# EAGLE board breakout_mdbt40 (EAGLE 7.4.0)
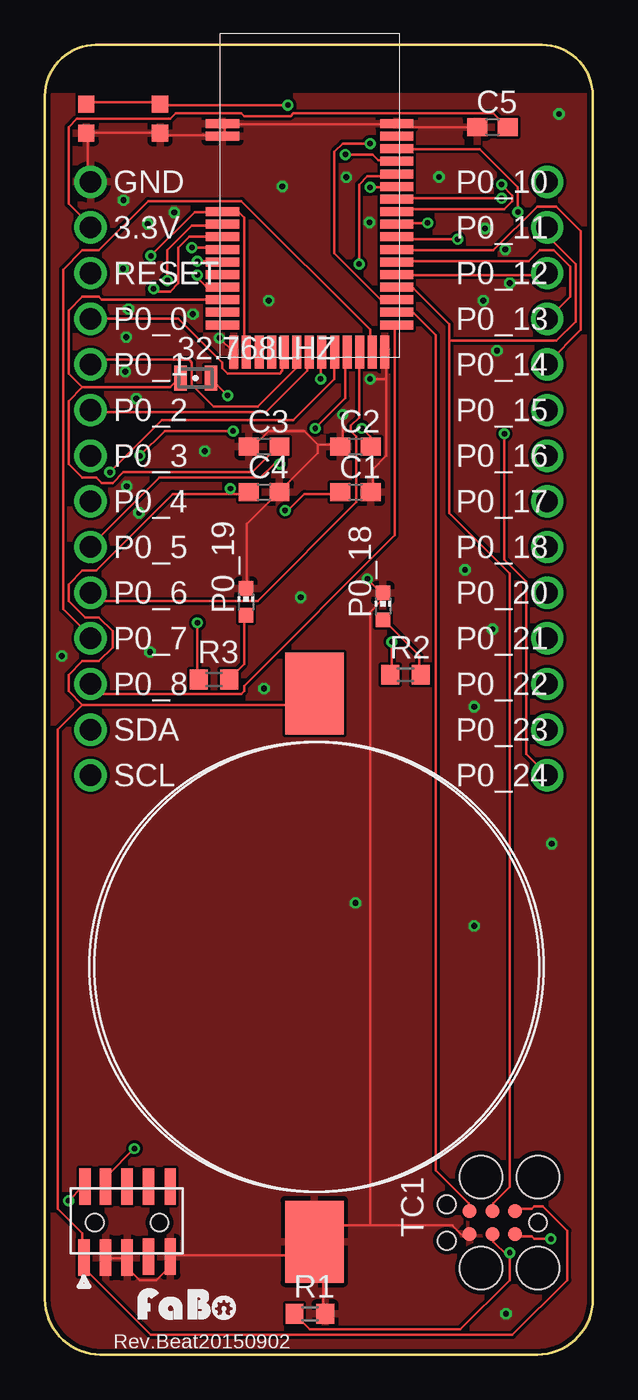
[diagram p0: board, top side]
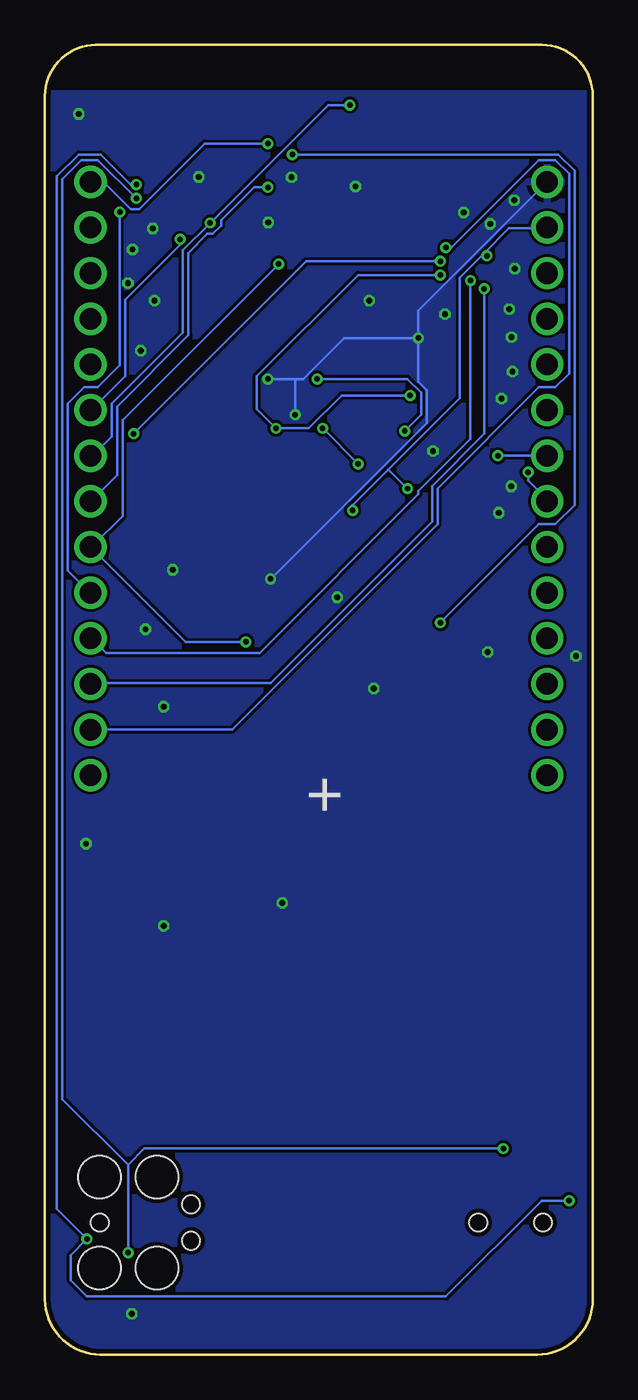
[diagram p1: board, bottom side, seen from below]

Size 30.48 x 72.88 mm. Coordinates in mm from the lower left corner, seen from the top.
Copper layers (1*16): Top 0.035mm / dielectric 1.5mm / Bottom 0.035mm
Design rules "SeeedStudio_2layer_DRU_no_angle_20140221": minimum track width 6mil, minimum drill 12mil, track to track 6mil, track to pad 6mil, pad to pad 6mil, via to via 6mil, smd to smd 0mil, copper to edge 10mil, drill to drill 10mil, minimum pad ring 10mil, minimum via ring 6mil, stop-mask expansion 2mil, vias tented up to drill 100mil, thermal gap 10mil
tRestrict: area -1.9,70.2 to 33.6,74.9
bRestrict: area -1.8,70.4 to 33.8,74.9

## Footprints (pad centres in the part's own frame; a part is rotated, then mirrored left to right if it is on the bottom)
FC-12M = smd 0.7 x 1.4: 1 -0.85,0; 2 0.85,0
C0603 = smd 1.1 x 1: 1 -0.85,0; 2 0.85,0
CHIP-LED0603 = smd 0.8 x 0.8: A 0,-0.75; C 0,0.75
R0603 = smd 1 x 1.1: 1 -0.85,0; 2 0.85,0
TC2030-IDC = smd 0.787 x 0.787: 1 -1.27,-0.635; 2 -1.27,0.635; 3 0,-0.635; 4 0,0.635; 5 1.27,-0.635; 6 1.27,0.635 | hole 0.991: -2.54,0; 2.54,1.016; 2.54,-1.016 | hole 2.375: -2.54,2.54; -2.54,-2.54; 0.635,2.54; 0.635,-2.54
RAYTAC-MDBT40 = smd 1.85 x 0.5: 1 -4.86,4; 2 -4.86,3.3; 3 -4.86,-0.9; 4 -4.86,-1.6; 5 -4.86,-2.3; 6 -4.86,-3; 7 -4.86,-3.7; 8 -4.86,-4.4; 9 -4.86,-5.1; 10 -4.86,-5.8; 11 -4.86,-6.5; 12 -4.86,-7.2; 26 4.84,-7.2; 27 4.84,-6.5; 28 4.84,-5.8; 29 4.84,-5.1; 30 4.84,-4.4; 31 4.84,-3.7; 32 4.84,-3; 33 4.84,-2.3; 34 4.84,-1.6; 35 4.84,-0.9; 36 4.84,-0.2; 37 4.84,0.5; 38 4.84,1.2; 39 4.84,1.9; 40 4.84,2.6; 41 4.84,3.3; 42 4.84,4 | smd 0.5 x 1.85: 13 -4.22,-8.71; 14 -3.52,-8.71; 15 -2.82,-8.71; 16 -2.12,-8.71; 17 -1.42,-8.71; 18 -0.72,-8.71; 19 -0.02,-8.71; 20 0.68,-8.71; 21 1.38,-8.71; 22 2.08,-8.71; 23 2.78,-8.71; 24 3.48,-8.71; 25 4.18,-8.71
SMTU2450 = smd 3.251 x 4.572: P$_GND 0,-15.29; P$_VCC 0,15.21
BREAKOUT_BLE_NORDIC = drill 1.2: 3.3V -12.7,24.13; GND -12.7,26.67; P0_0 -12.7,19.05; P0_1 -12.7,16.51; P0_2 -12.7,13.97; P0_3 -12.7,11.43; P0_4 -12.7,8.89; P0_5 -12.7,6.35; P0_6 -12.7,3.81; P0_7 -12.7,1.27; P0_8 -12.7,-1.27; P1_0 12.7,26.67; P1_1 12.7,24.13; P1_2 12.7,21.59; P1_3 12.7,19.05; P1_4 12.7,16.51; P1_5 12.7,13.97; P1_6 12.7,11.43; P1_7 12.7,8.89; P1_8 12.7,6.35; P2_0 12.7,3.81; P2_1 12.7,1.27; P2_2 12.7,-1.27; P2_3 12.7,-3.81; P2_4 12.7,-6.35; RESET -12.7,21.59; SCL -12.7,-6.35; SDA -12.7,-3.81
PIN-HEADER-SMT(1.27MM)2X5 = smd 0.635 x 2.032: 1 -2.4,-1.95; 2 -2.35,2; 3 -1.2,-1.95; 4 -1.2,2; 5 0,-1.95; 6 0,2; 7 1.2,-1.9; 8 1.2,2; 9 2.4,-1.9; 10 2.4,2 | hole 1: 1.8,0; -1.8,0
SWITCH-4P(KMR2) = smd 0.9 x 0.95: 1 -1,0; 2 3.1,0; 3 -1,-1.6; 4 3.1,-1.6

## Placement (x,y rotation side)
32.768LHZ  FC-12M  [FC-12M]  8.38,54.34 0 top
C1  0.1uf  [C0603]  17.27,47.99 0 top
C2  12pf  [C0603]  17.27,50.53 0 top
C3  12pf  [C0603]  12.19,50.53 0 top
C4  0.1uf  [C0603]  12.19,47.99 0 top
C5  0.1uf  [C0603]  24.89,68.31 0 top
P0_18  [CHIP-LED0603]  18.8,41.64 0 top
P0_19  [CHIP-LED0603]  11.18,41.89 0 top
R1  10K  [R0603]  14.73,2.27 0 top
R2  [R0603]  20.07,37.83 0 top
R3  [R0603]  9.4,37.57 0 top
TC1  TC2030-IDC  [TC2030-IDC]  24.89,7.35 180 top
U$1  RAYTAC-MDBT40  [RAYTAC-MDBT40]  14.73,64.5 0 top
U$2  SMTU2450-TOP  [SMTU2450]  14.99,21.57 0 top
U$3  BREAKOUT_BLE_NORDIC  [BREAKOUT_BLE_NORDIC]  15.24,38.59 0 top
U$4  PIN-HEADER-SMT(1.27MM)2X5  [PIN-HEADER-SMT(1.27MM)2X5]  4.57,7.35 0 top
U$5  SWICTH-4P(KMR2)  [SWITCH-4P(KMR2)]  3.3,69.58 0 top
U$7  [LOGO_FABO_S]  7.95,1.94 0 top

## Library data of the parts
32.768LHZ = crystal
C1-C5 R1-R3 = adafruit
P0_18 P0_19 = led
TC1 = TagConnect
U$1 = gclueBT
U$2 = GClue-Supply
U$3 U$4 = gclue
U$5 = gclue-test
U$7 = FaBo

## Nets
+3V3: C1.1 C4.1 C5.2 TC1.1 U$1.3 U$1.14 U$2.P$_VCC U$3.3.3V U$4.1
GND: C1.2 C2.1 C3.1 C4.2 C5.1 P0_18.C P0_19.C R1.2 TC1.6 U$1.1 U$1.2 U$1.13 U$1.25 U$1.42 U$2.P$_GND U$3.GND U$4.3 U$4.5 U$4.9 U$5.3 U$5.4
N$1: P0_18.A R2.2
N$2: P0_19.A R3.2
N$7: 32.768LHZ.2 C2.2 U$1.9
N$8: 32.768LHZ.1 C3.2 U$1.10
P0_00: U$1.17 U$3.P0_0
P0_01: U$1.18 U$3.P0_1
P0_02: U$1.19 U$3.P0_2
P0_03: U$1.20 U$3.P0_3
P0_04: U$1.21 U$3.P0_4
P0_05: U$1.22 U$3.P0_5
P0_06: U$1.23 U$3.P0_6
P0_07: U$1.24 U$3.P0_7
P0_08: U$1.26 U$3.P0_8
P0_09: TC1.5 U$1.27
P0_10: U$1.28 U$3.P1_0
P0_11: TC1.3 U$1.29 U$3.P1_1
P0_12: U$1.30 U$3.P1_2
P0_13: U$1.31 U$3.P1_3
P0_14: U$1.32 U$3.P1_4
P0_15: U$1.33 U$3.P1_5
P0_16: U$1.34 U$3.P1_6 U$5.1 U$5.2
P0_17: U$1.37 U$3.P1_7
P0_18: R2.1 U$1.38 U$3.P1_8
P0_19: R3.1 U$1.39
P0_20: U$1.40 U$3.P2_0
P0_21: U$1.4 U$3.P2_1
P0_22: U$1.5 U$3.P2_2
P0_23: U$1.6 U$3.P2_3
P0_24: U$1.7 U$3.P2_4
P0_25: U$1.8
P0_28: U$1.11
P0_29: U$1.12
P0_30: U$1.16
RESET: U$3.RESET
RESET1: U$4.10
SWCLK: R1.1 TC1.4 U$1.36 U$4.4
SWDIO: TC1.2 U$1.35 U$4.2

## Tracks (layer width: path | path; a pad name or v marks a point on that pad's centre or on a via)
+3V3  (via drill 0.3)
  Top 0.152: TC1.1 26.16,8.11 27.08,8.11 27.23,8.26 27.69,8.26 29.06,6.89 29.06,4.15 26.01,1.1 5.89,1.1 2.24,4.76 2.24,5.37 U$4.1 2.08,5.52 2.08,6.74 0.71,8.11 0.71,34.78 2.08,36.15 | 10.31,47.89 7.11,47.89 2.85,43.62 2.08,43.62 1.32,42.86 1.32,41.94 2.24,41.03 3,41.03 3.76,40.27 3.76,39.35 3,38.59 2.08,38.59 1.32,37.83 1.32,36.91 2.08,36.15 | 10.31,47.89 11.23,47.89 C4.1 | 2.08,36.15 14.28,36.15 14.88,36.76 U$2.P$_VCC | U$1.14 11.07,55.81 11.07,63.28 10.77,63.58 10.01,63.58 U$1.3 9.86,63.58 8.33,63.58 v5.89,61.15 | v13.36,46.97 13.51,46.97 14.43,47.89 16.41,47.89 C1.1 | C5.2 25.71,68.31 24.94,69.07 13.82,69.07 13.67,68.92 11.07,68.92 10.92,69.07 7.26,69.07 6.96,68.77 1.78,68.77 1.32,68.31 1.32,64.04 2.54,62.82 U$3.3.3V | v10.31,48.19 10.31,47.89
  Bottom 0.152: v13.36,46.97 13.36,47.28 11.38,49.26 | 11.38,49.26 7.42,53.22 7.42,59.93 6.05,61.3 | 6.05,61.3 4.67,62.67 2.54,62.67 U$3.3.3V | 6.05,61.3 v5.89,61.15 | 11.38,49.26 v10.31,48.19
GND  (via drill 0.3, 0.32)
  Top 0.152: 15.19,50.63 14.43,51.39 12.45,51.39 11.68,50.63 11.38,50.63 C3.1 | 15.19,50.63 16.41,50.63 C2.1 16.56,50.63 v16.56,52.31 | P0_19.C 11.23,42.7 11.23,46.21 12.9,47.89 C4.2 13.06,48.04 15.19,50.17 15.19,50.63 | 19,54.29 19,55.66 U$1.25 | 19,54.29 19,50.02 18.24,49.26 18.24,48.04 C1.2 | C5.1 19.76,68.31 19.61,68.46 U$1.42 19.46,68.46 10.01,68.46 | 10.01,68.46 10.01,67.85 U$1.2 9.86,67.85 6.5,67.85 U$5.4 6.35,68 2.39,68 U$5.3 2.39,67.85 2.39,65.41 U$3.GND | v9.7,56.57 10.47,55.81 U$1.13 | 10.01,68.46 U$1.1 | v18.09,54.29 19,54.29 | U$4.3 3.45,5.37 4.52,5.37 U$4.5 4.67,5.37 4.67,4.76 5.28,4.15 6.2,4.15 6.96,4.91 6.96,5.37 U$4.9 7.11,5.52 14.12,5.52 14.88,6.28 U$2.P$_GND | 18.09,7.2 15.8,7.2 15.04,6.43 U$2.P$_GND | 18.09,7.2 22.66,7.2 23.27,6.59 23.57,6.59 TC1.6 | 18.09,7.2 18.09,41.33 18.69,41.94 18.69,42.25 P0_18.C 18.69,42.4 v17.93,43.16 | R1.2 15.49,2.32 15.49,5.82 15.04,6.28 U$2.P$_GND
  Bottom 0.152: v9.7,56.57 9.7,58.1 U$3.GND | 16.56,54.29 16.1,54.29 13.82,56.57 v9.7,56.57 | 16.56,54.29 v18.09,54.29 | 16.56,54.29 v16.56,52.31 | v9.7,56.57 9.7,54.13 9.25,53.68 9.25,51.85 v17.93,43.16
  other vias: 17.27,25.13 23.88,23.86 28.19,28.43 12.45,58.66 25.65,2.27 23.88,36.05 24.89,40.37 23.37,43.67 13.21,65.01 8.89,50.27 14.22,42.15 5.84,39.1 12.19,37.07 16.76,65.51 25.15,55.86 24.38,58.66 25.86,59.62 21.92,65.54 28.6,69.04 0.94,38.87 18.06,63 8.23,57.89 4.65,58.17 4.52,56.62 4.34,60.43 7.19,63.56 4.37,64.24 5.72,62.92 4.47,54.69 5.08,53.2 24.49,62.67 25.6,61.5 4.55,48.32 5.23,46.84
  pour Bottom: -0.51,-0.27 32.51,-0.27 32.51,73.39 -0.51,73.39
  pour Top: -0.51,-0.27 32.51,-0.27 32.51,73.39 -0.51,73.39
N$1
  Top 0.152: P0_18.A 18.85,40.88 20.83,38.9 20.83,37.83 R2.2
N$2
  Top 0.152: P0_19.A 11.07,41.03 11.07,38.44 10.31,37.68 R3.2
N$7  (via drill 0.3)
  Top 0.152: v17.63,51.54 18.09,51.09 18.09,50.63 C2.2 | v10.16,53.37 9.25,54.29 32.768LHZ.2 | v8.48,60.08 8.48,59.93 8.94,59.47 9.86,59.47 U$1.9
  Bottom 0.152: v10.16,53.37 13.97,53.37 15.8,51.54 v17.63,51.54 18.69,52.61 18.69,54.44 13.06,60.08 v8.48,60.08
N$8
  Top 0.152: 2.08,53.83 1.32,53.07 1.32,49.56 2.08,48.8 2.85,48.8 3.15,48.5 3.76,48.5 4.37,49.11 11.53,49.11 12.9,50.48 C3.2 | 2.08,53.83 6.96,53.83 7.42,54.29 32.768LHZ.1 | 2.08,53.83 1.32,54.59 1.32,58.1 2.08,58.86 3,58.86 3.15,58.71 9.86,58.71 U$1.10
P0_00
  Top 0.152: U$3.P0_0 7.42,57.64 9.86,55.2 9.86,54.9 10.16,54.59 13.06,54.59 13.21,54.74 13.21,55.66 U$1.17
P0_01
  Top 0.152: U$1.18 13.97,55.66 13.97,54.9 11.84,52.76 9.4,52.76 8.18,53.98 8.18,55.2 8.03,55.35 2.69,55.35 2.54,55.2 U$3.P0_1
P0_02
  Top 0.152: U$1.19 14.58,55.66 14.58,54.74 12.29,52.46 2.54,52.46 U$3.P0_2
P0_03  (via drill 0.3)
  Top 0.152: v15.34,54.29 15.34,55.66 U$1.20 | v10.47,51.39 6.66,51.39 v5.28,50.02
  Bottom 0.152: v15.34,54.29 10.31,54.29 9.55,53.52 9.55,52.31 v10.47,51.39 | U$3.P0_3 v5.28,50.02
P0_04  (via drill 0.3)
  Top 0.152: v3.61,49.11 6.5,52 13.82,52 16.1,54.29 16.1,55.66 U$1.21
  Bottom 0.152: v3.61,49.11 3.61,48.65 2.54,47.58 U$3.P0_4
P0_05  (via drill 0.3)
  Top 0.152: v15.04,51.54 16.71,53.22 16.71,55.66 U$1.22 | v13.06,49.56 12.75,49.56 11.99,48.8 6.35,48.8 2.54,44.99 U$3.P0_5
  Bottom 0.152: v13.06,49.56 v15.04,51.54
P0_06
  Top 0.152: U$3.P0_6 3,41.94 11.84,41.94 17.32,47.43 17.32,51.09 17.02,51.39 17.02,51.7 17.48,52.15 17.48,55.66 U$1.23
P0_07
  Top 0.152: U$1.24 18.09,55.81 18.09,57.03 10.92,64.19 5.74,64.19 3,61.45 2.08,61.45 1.02,60.38 1.02,41.49 2.54,39.96 U$3.P0_7
P0_08
  Top 0.152: U$1.26 19.46,57.18 19.46,45.6 11.07,37.22 11.07,36.91 10.92,36.76 3,36.76 2.54,37.22 U$3.P0_8
P0_09
  Top 0.152: TC1.5 23.57,8.11 23.57,8.42 21.74,10.24 21.74,56.73 20.52,57.95 19.61,57.95 U$1.27
P0_10  (via drill 0.3)
  Top 0.152: v18.09,67.39 16.56,67.39 16.1,66.94 16.1,61.3 18.69,58.71 19.46,58.71 U$1.28
  Bottom 0.152: v18.09,67.39 21.59,67.39 25.25,63.74 25.71,63.74 27.23,65.26 U$3.P1_0
P0_11
  Top 0.152: 22.5,56.42 22.5,57.34 20.52,59.32 19.61,59.32 U$1.29 | 22.5,56.42 22.5,46.82 25.86,43.47 25.86,9.33 24.94,8.42 24.94,8.11 TC1.3 | 22.5,56.42 28.45,56.42 29.52,57.49 29.52,60.69 27.99,62.21 27.99,62.67 U$3.P1_1
P0_12
  Top 0.152: U$1.30 19.61,60.08 27.84,60.08 U$3.P1_2
P0_13
  Top 0.152: U$1.31 19.61,60.84 26.92,60.84 27.53,61.45 28.3,61.45 29.21,60.54 29.21,58.86 27.99,57.64 U$3.P1_3
P0_14
  Top 0.152: U$1.32 19.61,61.45 24.94,61.45 27.38,63.89 28.45,63.89 29.82,62.52 29.82,57.03 27.99,55.2 U$3.P1_4
P0_15  (via drill 0.3)
  Top 0.152: v22.96,62.06 19.61,62.06 U$1.33
  Bottom 0.152: v22.96,62.06 22.96,61.76 26.01,58.71 26.01,54.44 27.84,52.61 U$3.P1_5
P0_16  (via drill 0.3)
  Top 0.152: U$5.1 2.39,69.68 6.35,69.68 U$5.2 6.5,69.53 v13.51,69.53 | v21.29,62.97 19.61,62.97 U$1.34
  Bottom 0.152: U$3.P1_6 27.84,50.02 26.77,51.09 26.77,52.92 22.81,56.88 22.81,61.45 v21.29,62.97 14.73,69.53 v13.51,69.53
P0_17  (via drill 0.3)
  Top 0.152: v18.09,64.96 19.46,64.96 U$1.37
  Bottom 0.152: v18.09,64.96 18.85,64.96 20.68,63.13 20.68,62.82 21.13,62.36 21.44,62.36 22.5,61.3 22.5,56.73 26.47,52.76 26.47,48.95 U$3.P1_7
P0_18  (via drill 0.3)
  Top 0.152: v19.3,39.66 19.3,37.83 R2.1 | v17.48,60.69 17.48,65.11 17.93,65.56 19.46,65.56 U$1.38
  Bottom 0.152: v19.3,39.66 22.66,39.66 U$3.P1_8 27.84,44.99 26.16,46.67 26.16,52 v17.48,60.69
P0_19  (via drill 0.3)
  Top 0.152: v8.48,40.72 8.48,37.68 R3.1 | v16.71,66.78 18.24,66.78 18.54,66.48 19.46,66.48 U$1.39
  Bottom 0.152: v8.48,40.72 3,46.21 2.08,46.21 1.02,47.28 1.02,65.87 1.93,66.78 v16.71,66.78
P0_20  (via drill 0.3)
  Top 0.152: v26.31,63.58 26.31,64.96 24.18,67.09 19.61,67.09 U$1.40
  Bottom 0.152: v26.31,63.58 26.31,55.05 27.53,53.83 28.3,53.83 29.21,52.92 29.21,43.62 27.99,42.4 U$3.P2_0
P0_21  (via drill 0.3)
  Top 0.152: v6.81,59.77 6.81,61.45 8.18,62.82 9.86,62.82 U$1.4
  Bottom 0.152: v6.81,59.77 6.81,50.93 9.7,48.04 9.7,47.89 18.54,39.05 27.08,39.05 27.84,39.81 U$3.P2_1
P0_22  (via drill 0.3)
  Top 0.152: v6.05,59.32 6.2,59.16 6.96,59.16 7.42,59.62 7.42,61.6 8.03,62.21 9.86,62.21 U$1.5
  Bottom 0.152: v6.05,59.32 6.05,51.24 8.94,48.34 8.94,46.36 17.93,37.37 27.84,37.37 U$3.P2_2
P0_23  (via drill 0.3)
  Top 0.152: v8.18,61.6 9.86,61.6 U$1.6
  Bottom 0.152: v8.18,61.6 7.87,61.6 3,66.48 2.08,66.48 1.32,65.72 1.32,54.59 2.08,53.83 3,53.83 8.64,48.19 8.64,46.21 20.07,34.78 U$3.P2_3
P0_24  (via drill 0.3)
  Top 0.152: v8.48,60.84 9.86,60.84 U$1.7 | v25.55,51.24 25.55,44.23 26.77,43.01 26.77,33.41 U$3.P2_4
  Bottom 0.152: v8.48,60.84 15.95,60.84 v25.55,51.24
SWCLK  (via drill 0.3)
  Top 0.152: 25.71,5.52 25.86,5.37 25.86,4.15 23.11,1.4 14.73,1.4 13.97,2.17 R1.1 | 25.71,5.52 24.94,6.28 24.94,6.59 TC1.4 | v25.4,64.35 19.61,64.35 U$1.36 | 25.71,5.52 v25.86,5.67 | v4.98,11.46 3.45,9.94 3.45,9.48 U$4.4
  Bottom 0.152: v25.4,64.35 27.53,66.48 28.45,66.48 29.52,65.41 29.52,14.21 25.86,10.55 | v25.86,5.67 25.86,10.55 | v4.98,11.46 24.94,11.46 25.86,10.55
SWDIO  (via drill 0.3)
  Top 0.152: v28.14,6.43 27.23,6.43 27.08,6.59 26.16,6.59 TC1.2 | v1.32,8.57 2.08,9.33 U$4.2 | v25.4,65.11 26.01,64.5 26.01,64.19 25.55,63.74 19.61,63.74 U$1.35
  Bottom 0.152: v1.32,8.57 2.85,8.57 8.18,3.23 28.14,3.23 29.06,4.15 29.06,5.52 v28.14,6.43 29.82,8.11 29.82,65.56 28.6,66.78 27.38,66.78 25.71,65.11 v25.4,65.11

## Text on the board
tPlace: Rev.Beat20150902